# EAGLE board mobo_v1.0_6-20-18 (EAGLE 6.6.0)
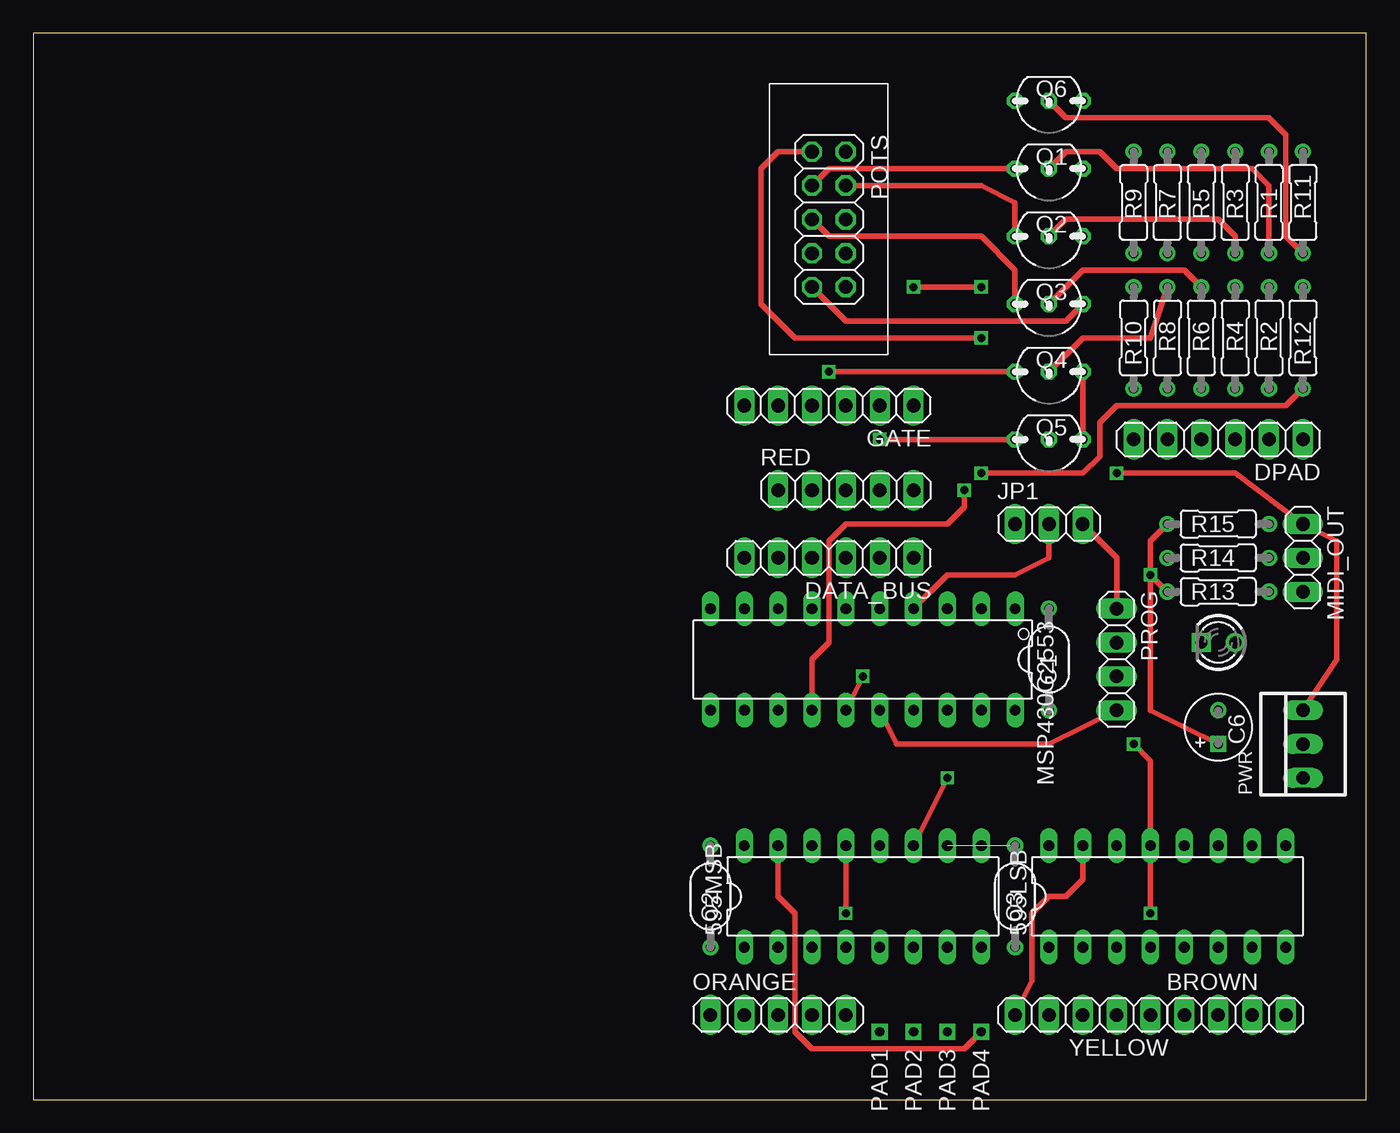
[diagram p0: board, top side]
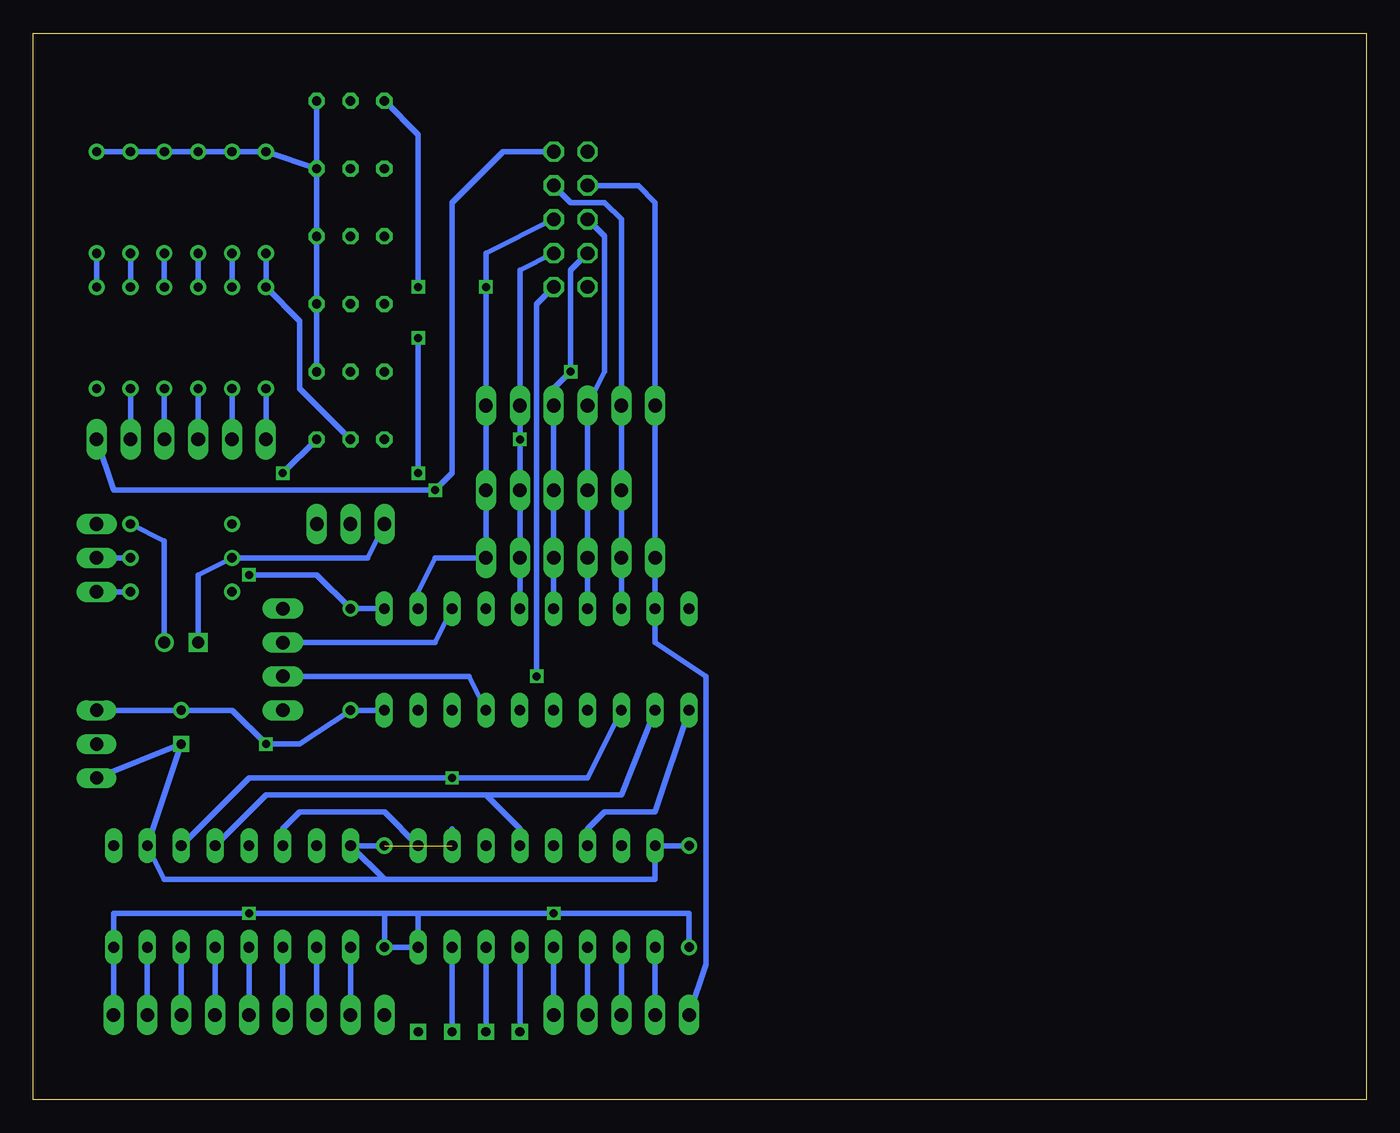
[diagram p1: board, bottom side, seen from below]

Size 100 x 80 mm. Coordinates in mm from the lower left corner, seen from the top.
Outline: 0,0 100,0 100,80 0,80 0,0
Copper layers (1*16): Top 0.035mm / dielectric 1.5mm / Bottom 0.035mm
Design rules "default": minimum track width 10mil, minimum drill 24mil, track to track 8mil, track to pad 8mil, pad to pad 8mil, via to via 8mil, smd to smd 8mil, copper to edge 40mil, drill to drill 8mil, minimum pad ring 10mil, minimum via ring 8mil, stop-mask expansion 4mil, vias tented up to drill 0mil, thermal gap 10mil

## Footprints (pad centres in the part's own frame; a part is rotated, then mirrored left to right if it is on the bottom)
DIL16 = drill 0.813 long: 1 -8.89,-3.81; 2 -6.35,-3.81; 3 -3.81,-3.81; 4 -1.27,-3.81; 5 1.27,-3.81; 6 3.81,-3.81; 7 6.35,-3.81; 8 8.89,-3.81; 9 8.89,3.81; 10 6.35,3.81; 11 3.81,3.81; 12 1.27,3.81; 13 -1.27,3.81; 14 -3.81,3.81; 15 -6.35,3.81; 16 -8.89,3.81
1X04 = drill 1.016 long: 1 -3.81,0; 2 -1.27,0; 3 1.27,0; 4 3.81,0
050X030_050_3 = drill 0.7: 1 -3.81,0; 2 3.81,0
050_020_1 = drill 0.7 square: + -1.27,0 | drill 0.7: - 1.27,0
1X06 = drill 1.016 long: 1 -6.35,0; 2 -3.81,0; 3 -1.27,0; 4 1.27,0; 5 3.81,0; 6 6.35,0
1X03 = drill 1.016 long: 1 -2.54,0; 2 0,0; 3 2.54,0
LED3MM = drill 0.9: A -1.27,0 | drill 0.9 square: K 1.27,0
N20 = drill 0.813 long: 1 -11.435,-3.81; 2 -8.895,-3.81; 3 -6.355,-3.81; 4 -3.815,-3.81; 5 -1.275,-3.81; 6 1.265,-3.81; 7 3.805,-3.81; 8 6.345,-3.81; 9 8.885,-3.81; 10 11.425,-3.81; 11 11.425,3.81; 12 8.885,3.81; 13 6.345,3.81; 14 3.805,3.81; 15 1.265,3.81; 16 -1.275,3.81; 17 -3.815,3.81; 18 -6.355,3.81; 19 -8.895,3.81; 20 -11.435,3.81
1X05 = drill 1.016 long: 1 -5.08,0; 2 -2.54,0; 3 0,0; 4 2.54,0; 5 5.08,0
SQUARE = drill 0.7 square: 1 0,0
2X05 = drill 1.016 octagon: 1 -5.08,-1.27; 2 -5.08,1.27; 3 -2.54,-1.27; 4 -2.54,1.27; 5 0,-1.27; 6 0,1.27; 7 2.54,-1.27; 8 2.54,1.27; 9 5.08,-1.27; 10 5.08,1.27
22-23-2031 = drill 1 long: 1 -2.54,0; 2 0,0; 3 2.54,0
TO92- = drill 0.7 octagon: 1 2.54,0; 2 0,0; 3 -2.54,0
R0207/3 = drill 0.7: 1 -3.81,0; 2 3.81,0

## Placement (x,y rotation side)
595LSB  74LS595N  [DIL16]  85.09,15.24 0 top
595MSB  74LS595N  [DIL16]  62.23,15.24 0 top
BROWN  [1X04]  90.17,6.35 0 top
C1  100n  [050X030_050_3]  76.2,33.02 90 top
C2  100n  [050X030_050_3]  50.8,15.24 90 top
C3  100n  [050X030_050_3]  73.66,15.24 90 top
C6  [050_020_1]  88.9,27.94 90 top
DATA_BUS  [1X06]  59.69,40.64 180 top
DPAD  [1X06]  88.9,49.53 180 top
GATE  [1X06]  59.69,52.07 180 top
JP1  [1X03]  76.2,43.18 0 top
LED1  LED3MM  [LED3MM]  88.9,34.29 180 top
MIDI_OUT  [1X03]  95.25,40.64 270 top
MSP430G2553  G2XX3---N20  [N20]  62.23,33.02 180 top
ORANGE  [1X05]  55.88,6.35 0 top
PAD1  [SQUARE]  63.5,5.08 270 top
PAD2  [SQUARE]  66.04,5.08 270 top
PAD3  [SQUARE]  68.58,5.08 270 top
PAD4  [SQUARE]  71.12,5.08 270 top
POTS  [2X05]  59.69,66.04 270 top
PROG  [1X04]  81.28,33.02 270 top
PWR  22-23-2031  [22-23-2031]  95.25,26.67 90 top
Q1  2N3904  [TO92-]  76.2,69.85 180 top
Q2  2N3904  [TO92-]  76.2,64.77 180 top
Q3  2N3904  [TO92-]  76.2,59.69 180 top
Q4  2N3904  [TO92-]  76.2,54.61 180 top
Q5  2N3904  [TO92-]  76.2,49.53 180 top
Q6  2N3904  [TO92-]  76.2,74.93 180 top
R1  300k  [R0207/3]  92.71,67.31 90 top
R2  1k  [R0207/3]  92.71,57.15 270 top
R3  300k  [R0207/3]  90.17,67.31 90 top
R4  1k  [R0207/3]  90.17,57.15 270 top
R5  300k  [R0207/3]  87.63,67.31 90 top
R6  1k  [R0207/3]  87.63,57.15 270 top
R7  300k  [R0207/3]  85.09,67.31 90 top
R8  1k  [R0207/3]  85.09,57.15 270 top
R9  300k  [R0207/3]  82.55,67.31 90 top
R10  1k  [R0207/3]  82.55,57.15 270 top
R11  300k  [R0207/3]  95.25,67.31 90 top
R12  1k  [R0207/3]  95.25,57.15 270 top
R13  47R  [R0207/3]  88.9,38.1 180 top
R14  47R  [R0207/3]  88.9,40.64 180 top
R15  120R  [R0207/3]  88.9,43.18 180 top
RED  [1X05]  60.96,45.72 0 top
YELLOW  [1X05]  78.74,6.35 180 top

## Library data of the parts
595LSB 595MSB = 74xx-us
BROWN DATA_BUS DPAD GATE JP1 MIDI_OUT ORANGE POTS PROG RED YELLOW = pinhead
C1-C3 = gm-caps-ceramic
C6 = gm-caps-electro-pol
LED1 = gm-diodes
MSP430G2553 = TI_MSP430_v16
PAD1-PAD4 = gm-supply
PWR = jaapie; MF: MOLEX; MPN: 22-23-2031; OC_FARNELL: 1462950; OC_NEWARK: 30C0862
Q1-Q6 = gm-trans
R1-R15 = gm-resistors

## Nets
_RST: MSP430G2553.16 PROG.4
ANALOG_CTL: MSP430G2553.15 POTS.10
BUTTON_CTL: DPAD.1 MSP430G2553.14 POTS.2
CTL_C: 595MSB.15 PAD4.1
D0: DATA_BUS.1 GATE.1 MSP430G2553.2 POTS.6 Q6.1 RED.5
D1: DATA_BUS.2 GATE.2 MSP430G2553.5 POTS.8 Q5.1 RED.4
D2: DATA_BUS.3 GATE.3 MSP430G2553.6 POTS.7 Q4.1 RED.3
D3: DATA_BUS.4 GATE.4 MSP430G2553.7 POTS.5 Q3.1 RED.2
D4: DATA_BUS.5 GATE.5 MSP430G2553.8 POTS.4 Q2.1 RED.1
D5: DATA_BUS.6 GATE.6 MSP430G2553.9 ORANGE.1 POTS.3 Q1.1
D_DOWN: DPAD.6 R10.2
D_LEFT: DPAD.5 R8.2
D_RIGHT: DPAD.4 R6.2
D_UP: DPAD.3 R4.2
GATE_CTL: 595MSB.5 PAD1.1
GND: 595LSB.8 595LSB.13 595MSB.8 595MSB.13 BROWN.4 C1.1 C2.1 C3.1 C6.- MIDI_OUT.1 MSP430G2553.20 POTS.9 PWR.3 Q1.3 Q2.3 Q3.3 Q4.3 Q5.3 Q6.3 R1.2 R3.2 R5.2 R7.2 R9.2 R11.2
M_F1: 595LSB.1 YELLOW.4
M_F2: 595LSB.2 YELLOW.3
M_F3: 595LSB.3 YELLOW.2
M_F4: 595LSB.4 YELLOW.1
M_F5: 595MSB.4 ORANGE.5
M_F6: 595MSB.3 ORANGE.4
M_F7: 595MSB.2 ORANGE.3
M_F8: 595MSB.1 ORANGE.2
M_F9: 595LSB.7 BROWN.3
M_F10: 595LSB.15 YELLOW.5
M_F11: 595LSB.6 BROWN.2
M_F12: 595LSB.5 BROWN.1
MIDI_OUT+: MIDI_OUT.3 R13.1
MIDI_OUT-: MIDI_OUT.2 R14.1
N$1: Q6.2 R11.1 R12.1
N$2: 595LSB.14 595MSB.9
N$3: 595MSB.6 PAD2.1
N$4: 595MSB.7 PAD3.1
N$6: LED1.A R15.1
N$7: JP1.1 LED1.K R14.2
N$8: JP1.3 PROG.1
N$13: Q1.2 R1.1 R2.1
N$14: Q2.2 R3.1 R4.1
N$15: Q3.2 R5.1 R6.1
N$16: Q4.2 R7.1 R8.1
N$17: Q5.2 R9.1 R10.1
RCK: 595LSB.12 595MSB.12 MSP430G2553.12
RXD: MSP430G2553.3 PROG.2
SB_2: POTS.1 R12.2
SCK: 595LSB.11 595MSB.11 MSP430G2553.13
SER: 595MSB.14 MSP430G2553.11
TEST: MSP430G2553.17 PROG.3
TXD: JP1.2 MSP430G2553.4
VA: 595LSB.10 595LSB.16 595MSB.10 595MSB.16 C1.2 C2.2 C3.2 C6.+ MSP430G2553.1 PWR.1 R13.2 R15.2
VB: PWR.2
X_BUTTON: DPAD.2 R2.2

## Tracks (layer width: path | path; a pad name or v marks a point on that pad's centre or on a via)
_RST
  Top 0.406: MSP430G2553.16 64.77,26.67 76.2,26.67 PROG.4
ANALOG_CTL  (via drill 0.6)
  Top 0.406: v62.23,31.75 MSP430G2553.15
  Bottom 0.406: POTS.10 62.23,59.69 v62.23,31.75
BUTTON_CTL  (via drill 0.6)
  Top 0.406: MSP430G2553.14 58.42,33.02 59.69,34.29 59.69,41.91 60.96,43.18 68.58,43.18 69.85,44.45 v69.85,45.72
  Bottom 0.406: POTS.2 64.77,71.12 68.58,67.31 68.58,46.99 v69.85,45.72 93.98,45.72 DPAD.1
CTL_C
  Top 0.406: 595MSB.15 55.88,15.24 57.15,13.97 57.15,5.08 58.42,3.81 69.85,3.81 PAD4.1
D0  (via drill 0.6)
  Top 0.406: v71.12,60.96 v66.04,60.96
  Bottom 0.406: MSP430G2553.2 71.12,38.1 69.85,40.64 DATA_BUS.1 RED.5 GATE.1 v66.04,60.96 66.04,63.5 POTS.6 | Q6.1 71.12,72.39 v71.12,60.96
D1  (via drill 0.6)
  Top 0.406: Q5.1 v63.5,49.53
  Bottom 0.406: POTS.8 63.5,62.23 GATE.2 v63.5,49.53 RED.4 DATA_BUS.2 63.5,39.37 MSP430G2553.5
D2  (via drill 0.6)
  Top 0.406: Q4.1 v59.69,54.61
  Bottom 0.406: POTS.7 59.69,62.23 v59.69,54.61 60.96,53.34 GATE.3 RED.3 DATA_BUS.3 MSP430G2553.6
D3
  Top 0.406: POTS.5 59.69,64.77 71.12,64.77 73.66,62.23 Q3.1
  Bottom 0.406: POTS.5 57.15,64.77 57.15,54.61 GATE.4 RED.2 DATA_BUS.4 MSP430G2553.7
D4
  Top 0.406: POTS.4 71.12,68.58 73.66,67.31 Q2.1
  Bottom 0.406: POTS.4 59.69,67.31 57.15,67.31 55.88,66.04 GATE.5 RED.1 DATA_BUS.5 MSP430G2553.8
D5
  Top 0.406: POTS.3 59.69,69.85 Q1.1
  Bottom 0.406: MSP430G2553.9 53.34,35.55 | ORANGE.1 49.53,10.16 49.53,31.75 53.34,34.29 MSP430G2553.9 | POTS.3 54.61,68.58 53.34,67.31 GATE.6 DATA_BUS.6 MSP430G2553.9
D_DOWN
  Bottom 0.406: DPAD.6 R10.2
D_LEFT
  Bottom 0.406: DPAD.5 R8.2
D_RIGHT
  Bottom 0.406: DPAD.4 R6.2
D_UP
  Bottom 0.406: DPAD.3 R4.2
GATE_CTL
  Bottom 0.406: 595MSB.5 PAD1.1
GND  (via drill 0.6)
  Top 0.406: 595MSB.13 v60.96,13.97 | v83.82,13.97 595LSB.13 83.82,25.4 v82.55,26.67 | PWR.3 97.79,33.02 97.79,41.91 MIDI_OUT.1 90.17,46.99 v81.28,46.99 | Q5.3 Q4.3 | POTS.9 60.96,58.42 77.47,58.42 Q3.3
  Bottom 0.406: BROWN.4 595LSB.8 93.98,13.97 v83.82,13.97 73.66,13.97 | PWR.3 C6.- 85.09,29.21 v82.55,26.67 80.01,26.67 C1.1 MSP430G2553.20 | C2.1 50.8,13.97 v60.96,13.97 71.12,13.97 | 71.12,13.97 73.66,13.97 | 73.66,13.97 C3.1 595MSB.8 71.12,13.97 | Q4.3 Q3.3 Q2.3 Q1.3 | Q1.3 R9.2 R7.2 R5.2 R3.2 R1.2 R11.2 | Q6.3 Q1.3 | Q5.3 v81.28,46.99
M_F1
  Bottom 0.406: YELLOW.4 595LSB.1
M_F2
  Bottom 0.406: 595LSB.2 YELLOW.3
M_F3
  Bottom 0.406: YELLOW.2 595LSB.3
M_F4
  Bottom 0.406: 595LSB.4 YELLOW.1
M_F5
  Bottom 0.406: 595MSB.4 ORANGE.5
M_F6
  Bottom 0.406: ORANGE.4 595MSB.3
M_F7
  Bottom 0.406: ORANGE.3 595MSB.2
M_F8
  Bottom 0.406: ORANGE.2 595MSB.1
M_F9
  Bottom 0.406: BROWN.3 595LSB.7
M_F10
  Top 0.406: 595LSB.15 78.74,16.51 77.47,15.24 76.2,15.24 74.93,13.97 74.93,8.89 YELLOW.5
M_F11
  Bottom 0.406: 595LSB.6 BROWN.2
M_F12
  Bottom 0.406: BROWN.1 595LSB.5
MIDI_OUT+
  Bottom 0.406: MIDI_OUT.3 R13.1
MIDI_OUT-
  Bottom 0.406: MIDI_OUT.2 R14.1
N$1
  Top 0.406: Q6.2 77.47,73.66 92.71,73.66 93.98,72.39 93.98,64.77 R11.1
  Bottom 0.406: R12.1 R11.1
N$2
  Bottom 0.406: 595MSB.9 73.66,21.59 80.01,21.59 81.28,20.32 595LSB.14
N$3
  Bottom 0.406: 595MSB.6 PAD2.1
N$4
  Bottom 0.406: 595MSB.7 PAD3.1
N$6
  Bottom 0.406: LED1.A 90.17,41.91 R15.1
N$7
  Bottom 0.406: JP1.1 74.93,40.64 R14.2 87.63,39.37 LED1.K
N$8
  Top 0.406: JP1.3 81.28,40.64 PROG.1
N$13
  Top 0.406: R1.1 92.71,68.58 91.44,69.85 81.28,69.85 80.01,71.12 77.47,71.12 Q1.2
  Bottom 0.406: R1.1 R2.1
N$14
  Top 0.406: R3.1 90.17,64.77 88.9,66.04 77.47,66.04 Q2.2
  Bottom 0.406: R3.1 R4.1
N$15
  Top 0.406: R6.1 86.36,62.23 78.74,62.23 Q3.2
  Bottom 0.406: R5.1 R6.1
N$16
  Top 0.406: R8.1 83.82,57.15 78.74,57.15 Q4.2
  Bottom 0.406: R7.1 R8.1
N$17
  Bottom 0.406: R9.1 R10.1 80.01,58.42 80.01,53.34 Q5.2
RCK
  Bottom 0.406: 595MSB.12 63.5,20.32 66.04,22.86 | 595LSB.12 82.55,22.86 66.04,22.86 | 66.04,22.86 55.88,22.86 MSP430G2553.12
RXD
  Bottom 0.406: MSP430G2553.3 69.85,34.29 PROG.2
SB_2  (via drill 0.6)
  Top 0.406: R12.2 93.98,52.07 81.28,52.07 80.01,50.8 80.01,48.26 78.74,46.99 v71.12,46.99 | POTS.1 55.88,71.12 54.61,69.85 54.61,59.69 57.15,57.15 v71.12,57.15
  Bottom 0.406: v71.12,57.15 v71.12,46.99
SCK  (via drill 0.6)
  Top 0.406: 595MSB.11 v68.58,24.13
  Bottom 0.406: 595LSB.11 83.82,24.13 v68.58,24.13 58.42,24.13 MSP430G2553.13
SER
  Bottom 0.406: 595MSB.14 58.42,20.32 57.15,21.59 53.34,21.59 MSP430G2553.11
TEST
  Bottom 0.406: PROG.3 67.31,31.75 MSP430G2553.17
TXD
  Top 0.406: JP1.2 76.2,40.64 73.66,39.37 68.58,39.37 MSP430G2553.4
VA  (via drill 0.6)  (1 unrouted)
  Top 0.406: R13.2 v83.82,39.37 | v83.82,39.37 83.82,41.91 R15.2 | v83.82,39.37 83.82,29.21 C6.+
  Bottom 0.406: C2.2 595MSB.16 53.34,16.51 73.66,16.51 | C3.2 595LSB.16 73.66,16.51 | 73.66,16.51 90.17,16.51 595LSB.10 C6.+ PWR.1 | 595MSB.10 68.58,20.32 | v83.82,39.37 78.74,39.37 C1.2 MSP430G2553.1
X_BUTTON
  Bottom 0.406: DPAD.2 R2.2